# Altium PCB final-project.PcbDoc
Units mil, origin at the board's own origin, x right, y up, seen from the top; angles counter-clockwise.
Board outline 8070 x 7040 mil, 2 copper layers (Top Layer, Bottom Layer); 74 components, 70 nets, 225 pads, 13 vias.
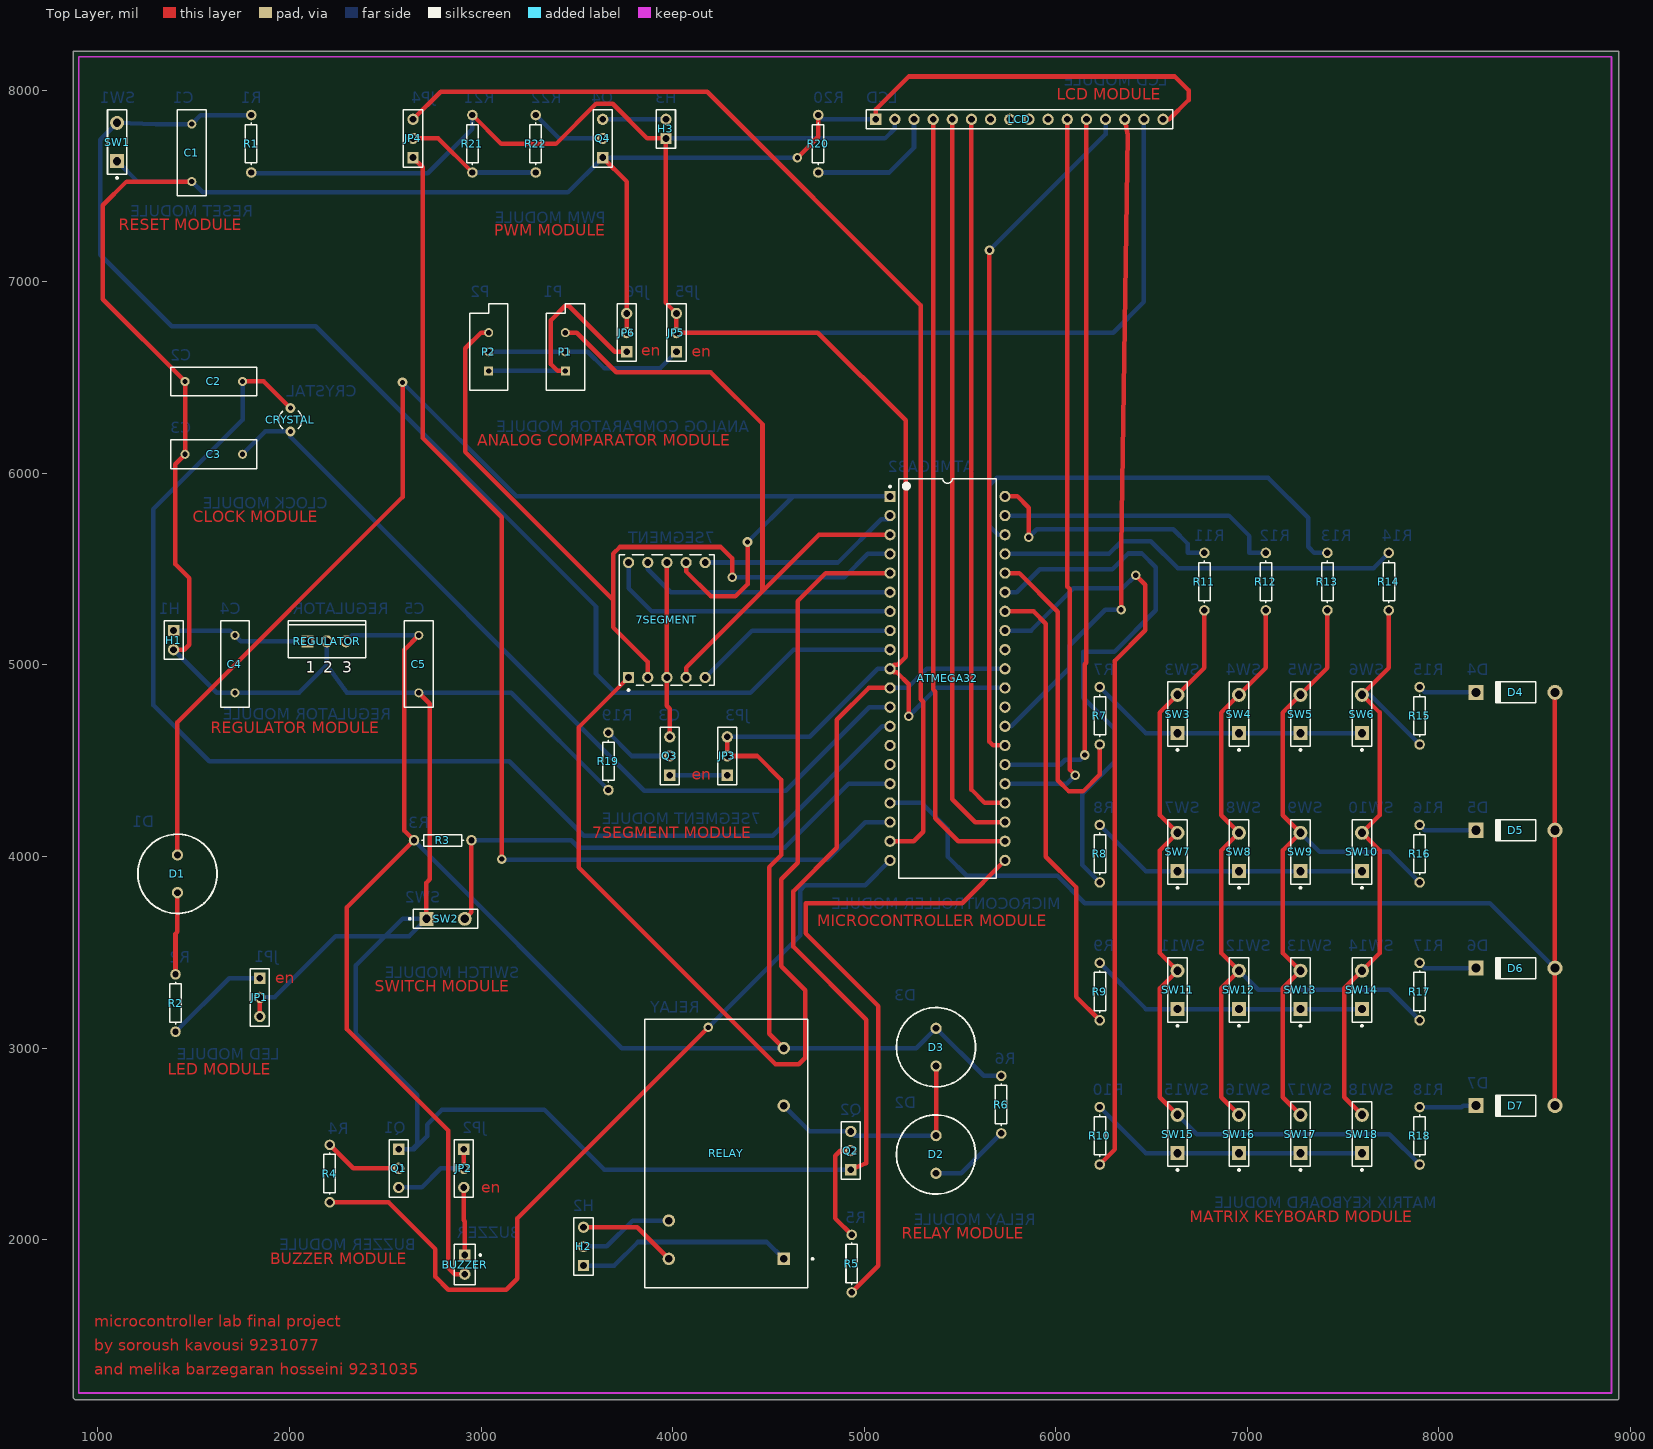
[diagram p0: Top Layer view]
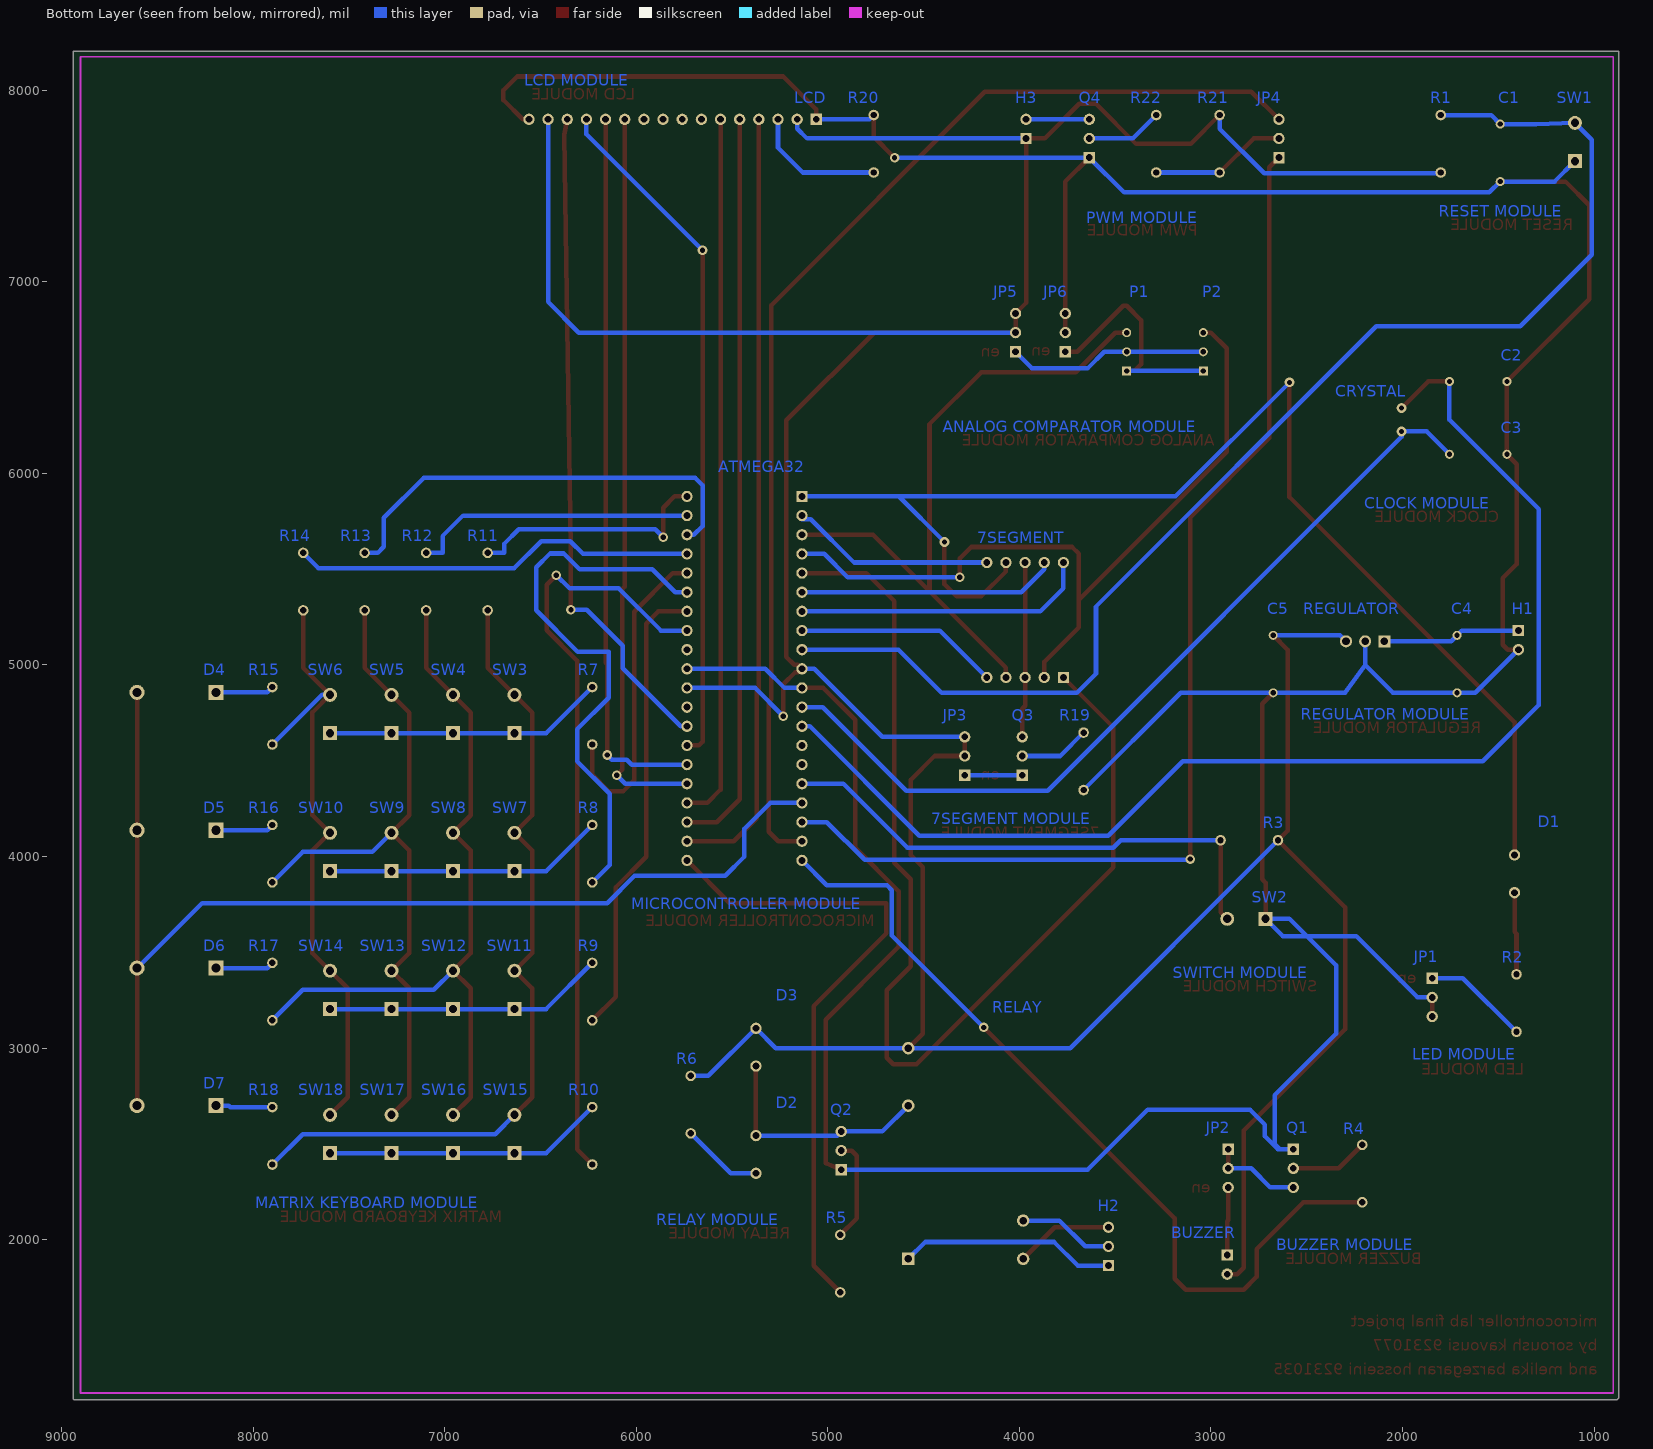
[diagram p1: Bottom Layer view, seen from below]

## Layer stack, top to bottom
Top Layer: signal copper 1.4
Dielectric: dielectric 12.6, FR-4, Dk 4.8
Bottom Layer: signal copper 1.4

## Board outline
870,8205 8940,8205 8940,1170 8935,1165 4515,1165 880,1165 870,1175 870,8205

## Design rules (kind name [scope] priority, off if disabled: settings)
Clearance [All] p1: gap=39.37
PolygonConnect [All] p1: connectstyle=Relief reliefconductorwidth=10 reliefentries=4 polygonreliefangle="90 Angle"
RoutingVias [All] p1: holewidth=28 width=50 viastyle="Through Hole" minholewidth=28 minwidth=50 maxholewidth=28 maxwidth=50
SilkscreenOverComponentPads [All] p1: minsilkscreentomaskgap=10
SolderMaskExpansion [All] p1: expansion=4
Width [All] p1: maxlimit=23.62 minlimit=23.62 preferedwidth=23.62 minimp=50.000000 maximp=50.000000 favimp=50.000000
27 further rules are at their usual default settings.

## Components (designator, comment, footprint, x,y, rotation, side; value= is the part's Value field where it differs from the comment)
7SEGMENT "HDSP-511A" HDSP-51 3970,5235 r0 top
ATMEGA32 "ATmega32A-PU" 40P6 5435,4930 r0 top
BUZZER "Bell" PIN2 2915,1920 r270 top
C1 "Cap" RAD-0.3 1490,7673.5 r90 top
C2 "Cap" RAD-0.3 1605,6480 r0 top
C3 "Cap" RAD-0.3 1605,6100 r0 top
C4 "Cap" RAD-0.3 1715,5005 r90 top
C5 "Cap" RAD-0.3 2675,5005 r90 top
CRYSTAL "XTAL" BCY-W2/D3.1 2005,6280 r0 top
D1 "LED0" RB5-10.5 1415,3910 r270 top
D2 "LED0" RB5-10.5 5375,2445 r90 top
D3 "LED0" RB5-10.5 5375,3005 r90 top
D4 "Diode 1N4001" DIO10.46-5.3x2.8 8400,4857.5 r180 top
D5 "Diode 1N4001" DIO10.46-5.3x2.8 8400,4137.5 r180 top
D6 "Diode 1N4001" DIO10.46-5.3x2.8 8400,3417.5 r180 top
D7 "Diode 1N4001" DIO10.46-5.3x2.8 8400,2700 r180 top
H1 "Header 2" HDR1X2 1395,5180 r270 top
H2 "Header 3" HDR1X3 3535,1865 r90 top
H3 "Header 2" HDR1X2 3965,7748.5 r90 top
JP1 "Header 3" HDR1X3 1845,3365 r270 top
JP2 "Header 3" HDR1X3 2910,2472.62 r270 top
JP3 "Header 3" HDR1X3 4285,4425 r90 top
JP4 "Header 3" HDR1X3 2645,7648.5 r90 top
JP5 "Header 3" HDR1X3 4020,6635 r90 top
JP6 "Header 3" HDR1X3 3760,6635 r90 top
LCD "Header 16" HDR1X16 5060,7848.5 r0 top
P1 "RPot" VR5 3440,6635 r90 top
P2 "RPot" VR5 3040,6635 r90 top
Q1 "2N3904" HDR1X3 2570,2472.62 r270 top
Q2 "2N3904" HDR1X3 4930,2365 r90 top
Q3 "2N3906" HDR1X3 3985,4425 r90 top
Q4 "2N3904" HDR1X3 3635,7648.5 r90 top
R1 "Res1" AXIAL-0.3 1800,7720.88 r270 top
R2 "Res1" AXIAL-0.3 1405,3235 r90 top
R3 "Res1" AXIAL-0.3 2800,4085 r180 top
R4 "Res1" AXIAL-0.3 2210,2345 r90 top
R5 "Res1" AXIAL-0.3 4935,1875 r90 top
R6 "Res1" AXIAL-0.3 5715,2705 r270 top
R7 "Res1" AXIAL-0.3 6230,4735 r90 top
R8 "Res1" AXIAL-0.3 6230,4015 r90 top
R9 "Res1" AXIAL-0.3 6230,3295 r90 top
R10 "Res1" AXIAL-0.3 6230,2542.5 r90 top
R11 "Res1" AXIAL-0.3 6775.93,5435 r90 top
R12 "Res1" AXIAL-0.3 7096.86,5435 r90 top
R13 "Res1" AXIAL-0.3 7417.8,5435 r90 top
R14 "Res1" AXIAL-0.3 7738.73,5435 r90 top
R15 "Res1" AXIAL-0.3 7899.19,4735 r90 top
R16 "Res1" AXIAL-0.3 7899.19,4015 r90 top
R17 "Res1" AXIAL-0.3 7899.19,3295 r90 top
R18 "Res1" AXIAL-0.3 7899.19,2542.5 r90 top
R19 "Res1" AXIAL-0.3 3665,4497.38 r90 top
R20 "Res1" AXIAL-0.3 4760,7720.88 r270 top
R21 "Res1" AXIAL-0.3 2955,7720.88 r90 top
R22 "Res1" AXIAL-0.3 3285,7720.88 r90 top
REGULATOR "MC7805ACT" 221A-04 2195,5123.7 r0 top
RELAY "Relay-SPDT" DIP-P5/X1.65 4280,2450 r90 top
SW1 "SW-PB" SPST-2 1100,7730 r90 top
SW2 "SW-PB" SPST-2 2815,3675 r0 top
SW3 "SW-PB" SPST-2 6635.47,4744.12 r90 top
SW4 "SW-PB" SPST-2 6956.4,4744.12 r90 top
SW5 "SW-PB" SPST-2 7277.33,4744.12 r90 top
SW6 "SW-PB" SPST-2 7598.26,4744.12 r90 top
SW7 "SW-PB" SPST-2 6635.47,4024.12 r90 top
SW8 "SW-PB" SPST-2 6956.4,4024.12 r90 top
SW9 "SW-PB" SPST-2 7277.33,4024.12 r90 top
SW10 "SW-PB" SPST-2 7598.26,4024.12 r90 top
SW11 "SW-PB" SPST-2 6635.47,3304.12 r90 top
SW12 "SW-PB" SPST-2 6956.4,3304.12 r90 top
SW13 "SW-PB" SPST-2 7277.33,3304.12 r90 top
SW14 "SW-PB" SPST-2 7598.26,3304.12 r90 top
SW15 "SW-PB" SPST-2 6635.47,2551.61 r90 top
SW16 "SW-PB" SPST-2 6956.4,2551.61 r90 top
SW17 "SW-PB" SPST-2 7277.33,2551.61 r90 top
SW18 "SW-PB" SPST-2 7598.26,2551.61 r90 top

## Footprints (in the part's own frame and the unit in brackets; to place one, negate y for a bottom-side part, rotate by r counter-clockwise, add the part's x,y. Pads: shape width x height; smd on the part's side, far side on the other; paste and mask are expansions set on the pad)
40P6 [mm] "DIP, 40-Leads, Row Spacing 15.24mm, Pitch 2.54mm, Body 52.2x13.95mm"
  rect 1.5x1.5 hole 0.9: 1(-7.62,24.13)
  round 1.5 hole 0.9: 2(-7.62,21.59) 3(-7.62,19.05) 4(-7.62,16.51) 5(-7.62,13.97) 6(-7.62,11.43) 7(-7.62,8.89) 8(-7.62,6.35) 9(-7.62,3.81) 10(-7.62,1.27) 11(-7.62,-1.27) 12(-7.62,-3.81) 13(-7.62,-6.35) 14(-7.62,-8.89) 15(-7.62,-11.43) 16(-7.62,-13.97) 17(-7.62,-16.51) 18(-7.62,-19.05) 19(-7.62,-21.59) 20(-7.62,-24.13) 21(7.62,-24.13) 22(7.62,-21.59) 23(7.62,-19.05) 24(7.62,-16.51) 25(7.62,-13.97) 26(7.62,-11.43) 27(7.62,-8.89) 28(7.62,-6.35) 29(7.62,-3.81) 30(7.62,-1.27) 31(7.62,1.27) 32(7.62,3.81) 33(7.62,6.35) 34(7.62,8.89) 35(7.62,11.43) 36(7.62,13.97) 37(7.62,16.51) 38(7.62,19.05) 39(7.62,21.59) 40(7.62,24.13)
  silkscreen extent -7.74,-26.5 6.45,26.5, body extent -7.05,-26.47 7.05,26.47, height 4.83
221A-04 [mm] "TO, Thru-Hole, Vertical, Heatsink Mounted; 3 In-Line Leads; Pitch 2.54 mm"
  rect 1.6x1.6 hole 1: 1(-2.54,0)
  round 1.6 hole 1: 2(0,0) 3(2.54,0)
  silkscreen extent -5.15,-2.2 5.15,2.7
AXIAL-0.3 [mm] "Axial Device, Thru-Hole; 2 Leads; 0.3 in Pin Spacing"
  round 1.4 hole 0.85: 1(-3.81,0) 2(3.81,0)
  silkscreen extent -2.77,-0.76 2.77,0.76
BCY-W2/D3.1 [mm] "Crystal, Thru-Hole; 2 Leads; Body 3.1 x 8.2 mm (Dia.xH)"
  round 1.3 hole 0.7: 1(0,1.55) 2(0,-1.55)
  silkscreen extent -1.55,-1.19 1.55,1.17
DIO10.46-5.3x2.8 [mm] "Diode, Axial; Body 5.2 x 2.7 mm (LxDia. max), Lead Dia. 0.86 mm (max)"
  round 2 hole 1.2: 1(-5.23,0)
  rect 2x2 hole 1.2: 2(5.23,0)
  silkscreen extent -2.65,-1.4 2.75,1.4
DIP-P5/X1.65 [mm] "DIP; 5 Round Pins; Row Space 15.24 mm; Pitch 2.54 mm"
  rect 1.65x1.65 hole 1: 1(-13.97,-7.62)
  round 1.65 hole 1: 2(-13.97,7.62) 3(-8.89,7.62) 4(13.97,-7.62) 5(6.35,-7.62)
  silkscreen extent -17.8,-11.58 17.8,10.8, body extent -17.8,-10.8 17.8,10.8, height 14
HDR1X2 [mm] "Connector; Header; 2 Position"
  rect 1.5x1.5 hole 0.9: 1(0,0)
  round 1.5 hole 0.9: 2(2.54,0)
  silkscreen extent -1.27,-1.27 3.81,1.27
HDR1X3 [mm] "Connector; Header; 3 Position"
  rect 1.5x1.5 hole 0.9: 1(0,0)
  round 1.5 hole 0.9: 2(2.54,0) 3(5.08,0)
  silkscreen extent -1.27,-1.27 6.35,1.27
HDR1X16 [mm] "Connector; Header; 16 Position"
  rect 1.5x1.5 hole 0.9: 1(0,0)
  round 1.5 hole 0.9: 2(2.54,0) 3(5.08,0) 4(7.62,0) 5(10.16,0) 6(12.7,0) 7(15.24,0) 8(17.78,0) 9(20.32,0) 10(22.86,0) 11(25.4,0) 12(27.94,0) 13(30.48,0) 14(33.02,0) 15(35.56,0) 16(38.1,0)
  silkscreen extent -1.27,-1.27 39.37,1.27
HDSP-51 [mm] "LED, 7-Segment Display, 14.27 mm, RHD; 10 Leads; Row Space 15.24 mm; Pitch 2.54 mm"
  rect 1.5x1.5 hole 0.9: 1(-5.08,-7.62)
  round 1.5 hole 0.9: 2(-2.54,-7.62) 3(0,-7.62) 4(2.54,-7.62) 5(5.08,-7.62) 6(5.08,7.62) 7(2.54,7.62) 8(0,7.62) 9(-2.54,7.62) 10(-5.08,7.62)
  silkscreen extent -6.3,-9.42 6.3,8.65
PIN2 [mm] "Photosensitive Diode; 2 Leads"
  rect 1.5x1.5 hole 0.9: 1(0,0)
  round 1.5 hole 0.9: 2(2.54,0)
  silkscreen extent -1.4,-1.4 3.94,2.18
RAD-0.3 [mm] "Radial Cap, Thru-Hole; 2 Leads; 0.3 in Pin Spacing"
  round 1.2 hole 0.7: 1(-3.81,0) 2(3.81,0)
  silkscreen extent -5.71,-1.91 5.72,1.91
RB5-10.5 [mm] "Motor, General Kind; 2 Leads"
  round 1.5 hole 0.9: 1(-2.5,0) 2(2.5,0)
  silkscreen extent -5.25,-5.25 5.25,5.25
SPST-2 [mm] "Circuit Breaker; 2 Leads"
  rect 1.85x1.85 hole 1.1: 1(-2.54,0)
  round 1.85 hole 1.1: 2(2.54,0)
  silkscreen extent -4.89,-1.27 4.28,1.27
VR5 [mm] "Variable Resistor, Thru-Hole; 3 Leads"
  rect 1.2x1.2 hole 0.7: 1(-2.54,0)
  round 1.2 hole 0.7: 2(0,0) 3(2.54,0)
  silkscreen extent -5.08,-2.54 6.35,2.54

## Part data
7SEGMENT: "14.22 mm General Purpose AlGaAs Red 7-Segment Display: CA, RH DP"
ATMEGA32: "8-bit AVR Microcontroller, 32KB Flash, 1KB EEPROM, 2KB SRAM, 40-pin PDIP, Industrial Grade (-40°C to 85°C)"
BUZZER: "Electrical Bell"
C1 C2 C3 C4 C5: "Capacitor"
CRYSTAL: "Crystal Oscillator"
D1 D2 D3: "Typical INFRARED GaAs LED"
D4 D5 D6 D7: "1 Amp General Purpose Rectifier"
H1 H3: "Header, 2-Pin"
H2 JP1 JP2 JP3 JP4 JP5 JP6: "Header, 3-Pin"
LCD: "Header, 16-Pin"
P1 P2: "Potentiometer"
Q1 Q2 Q4: "NPN General Purpose Amplifier"
Q3: "PNP General Purpose Amplifier"
R1 R2 R3 R4 R5 R6 R7 R8 R9 R10 R11 R12 R13 R14 R15 R16 R17 R18 R19 R20 R21 R22: "Resistor"
REGULATOR: "3-Terminal Positive Fixed Voltage Regulator"
RELAY: "Single-Pole Dual-Throw Relay"
SW1 SW2 SW3 SW4 SW5 SW6 SW7 SW8 SW9 SW10 SW11 SW12 SW13 SW14 SW15 SW16 SW17 SW18: "Switch"

## Via types
v1: diameter 50, hole 28, Top Layer to Bottom Layer, 13 vias

## Nets (pads, with @x,y where several pads share a name; then routed paths per layer and width w, separated by ;. In a path a pad name is that pad's centre, name@x,y a point inside that pad or via, vN(x,y) a via of type N, cw(c..) or ccw(c..) an arc to the next point about the centre after c; other vN are vias at no path point)
GND: ATMEGA32.11 ATMEGA32.31 C1.1 C2.1 C3.1 C4.1 C5.1 H1.2 JP1.2 JP1.3 JP6.2 JP6.3 LCD.1 LCD.16 Q1.1 Q2.1 Q4.1 R19.1 R20.1 REGULATOR.2 SW1.1 SW2.1 | length 23454.3
  Top Layer w23.62: H1.2 1450,5080 1476,5106 1476,5454 1403,5527 1403,6048 C3.1 C2.1 1026,6909 1026,7400 1149.5,7523.5 C1.1 ; JP1.3 JP1.2 ; C5.1 2733,4797 2733,3882 2715,3864 SW2.1 ; Q4.1 3760,7523.5 JP6.3 JP6.2 ; v1(4651.5,7648.5) 4760,7757 R20.1 ; Q2.1 5011,2400 5011,3148.7 4630.82,3528.88 4630.82,3819.16 4857,4045.33 4857,4714 5023,4880 ATMEGA32.11 ; LCD.1 5060,7900 5232,8072 6621,8072 6693,8000 6693,7949 6592.5,7848.5 LCD.16
  Bottom Layer w23.62: SW1.1 1206.5,7523.5 C1.1 1546.5,7467 3453.5,7467 Q4.1 v1(4651.5,7648.5) ; H1.2 1620,4855 C4.1 2050,4855 2195,5000 ; JP1.2 1922,3265 2242,3585 2500,3585 ; REGULATOR.2 2195,5000 ; R19.1 3157.38,4855 C5.1 2300,4855 2195,5000 ; R20.1 4782.38,7848.5 LCD.1 ; Q2.1 3644,2365 3331,2678 2796,2678 2718,2600 2718,2540.62 2650,2472.62 2640.62,2472.62 ; ATMEGA32.11 5226,4880 5326,4980 ATMEGA32.31 ; 2500,3585 2625,3585 SW2.1 2590,3675 2500,3585 ; 2500,3585 2347,3432 2347,3075 2668,2754 2668,2500 2640.62,2472.62 ; 2640.62,2472.62 Q1.1 2640.62,2472.62
Net7SEGMENT_3: 7SEGMENT.3 7SEGMENT.8 Q3.3 | length 916.2
  Top Layer w23.62: 7SEGMENT.8 7SEGMENT.3 3970,4787 3985,4772 Q3.3
NetBUZZER_1: BUZZER.1 JP2.3 | length 354.7
  Top Layer w23.62: JP2.3 2910,2101 2915,2096 BUZZER.1
NetC4_2: C4.2 H1.1 REGULATOR.1 | length 723.3
  Bottom Layer w23.62: H1.1 1690,5180 C4.2 1746.3,5123.7 REGULATOR.1
NetD1_2: D1.2 R2.2 | length 430.7
  Top Layer w23.62: R2.2 1405,3598 1415,3608 D1.2
NetD2_1: D2.1 R6.2 | length 426.3
  Bottom Layer w23.62: D2.1 5506.58,2346.58 R6.2
NetD2_2: D2.2 D3.1 Q2.3 RELAY.5 | length 1223
  Top Layer w23.62: D2.2 D3.1
  Bottom Layer w23.62: RELAY.5 4715,2565 Q2.3 4951.57,2543.43 D2.2
NetD4_2: D4.2 R15.2 | length 306.3
  Bottom Layer w23.62: R15.2 7926.69,4857.5 D4.2
NetD5_2: D5.2 R16.2 | length 306.3
  Bottom Layer w23.62: R16.2 7926.69,4137.5 D5.2
NetD6_2: D6.2 R17.2 | length 306.3
  Bottom Layer w23.62: R17.2 7926.69,3417.5 D6.2
NetD7_2: D7.2 R18.2 | length 298
  Bottom Layer w23.62: R18.2 8119,2692.5 8126.5,2700 D7.2
NetH2_1: H2.1 RELAY.1 | length 1132.4
  Bottom Layer w23.62: H2.1 3696,1865 3819,1988 4492,1988 RELAY.1
NetH2_2: H2.2 RELAY.3 | length 500.9
  Bottom Layer w23.62: H2.2 3657,1965 3792,2100 RELAY.3
NetH2_3: H2.3 RELAY.2 | length 513.3
  Top Layer w23.62: H2.3 3815,2065 RELAY.2
NetH3_2: H3.2 Q4.3 | length 330
  Bottom Layer w23.62: Q4.3 H3.2
NetJP1_1: JP1.1 R2.1 | length 556
  Bottom Layer w23.62: R2.1 1685,3365 JP1.1
NetJP2_1: JP2.1 JP2.2 Q1.3 | length 481.4
  Top Layer w23.62: JP2.2 JP2.1
  Bottom Layer w23.62: Q1.3 2690,2272.62 2790,2372.62 JP2.2
NetJP3_1: JP3.1 Q3.1 | length 300
  Bottom Layer w23.62: Q3.1 JP3.1
NetJP4_2: JP4.2 R21.1 R22.1 | length 713.6
  Top Layer w23.62: JP4.2 2777.38,7748.5 R21.1
  Bottom Layer w23.62: R21.1 R22.1
NetJP5_1: JP5.1 P1.2 P2.2 | length 1050.4
  Bottom Layer w23.62: P2.2 P1.2 3557,6635 3642,6550 3935,6550 JP5.1
NetJP6_1: JP6.1 P1.1 P2.1 | length 1245
  Top Layer w23.62: P1.1 3400,6535 3365,6570 3365,6800 3440,6875 3458,6875 3698,6635 JP6.1
  Bottom Layer w23.62: P2.1 P1.1
NetLCD_3: LCD.3 R20.2 | length 702
  Bottom Layer w23.62: R20.2 5130.88,7570.88 5260,7700 LCD.3
NetQ1_2: Q1.2 R4.2 | length 410.7
  Top Layer w23.62: R4.2 2332.38,2372.62 Q1.2
NetQ2_2: Q2.2 R5.2 | length 541.4
  Top Layer w23.62: Q2.2 4875,2465 4849,2439 4849,2111 R5.2
NetQ3_2: Q3.2 R19.2 | length 370.7
  Bottom Layer w23.62: R19.2 3787.38,4525 Q3.2
NetQ4_2: Q4.2 R22.2 | length 400.7
  Bottom Layer w23.62: R22.2 3407.38,7748.5 Q4.2
NetR7_2: R7.2 SW3.1 SW4.1 SW5.1 SW6.1 | length 1468
  Bottom Layer w23.62: R7.2 6470.88,4644.12 SW3.1 SW4.1 SW5.1 SW6.1
NetR8_2: R8.2 SW7.1 SW8.1 SW9.1 SW10.1 | length 1468
  Bottom Layer w23.62: R8.2 6470.88,3924.12 SW7.1 SW8.1 SW9.1 SW10.1
NetR9_2: R9.2 SW11.1 SW12.1 SW13.1 SW14.1 | length 1468
  Bottom Layer w23.62: R9.2 6470.88,3204.12 SW11.1 SW12.1 SW13.1 SW14.1
NetR10_2: R10.2 SW15.1 SW16.1 SW17.1 SW18.1 | length 1468
  Bottom Layer w23.62: R10.2 6470.88,2451.61 SW15.1 SW16.1 SW17.1 SW18.1
NetR11_1: R11.1 R18.1 SW3.2 SW7.2 SW11.2 SW15.2 | length 4292.4
  Top Layer w23.62: SW15.2 6543,2744.08 6543,3311.65 SW11.2 6543,3496.58 6543,4031.65 SW7.2 6543,4216.58 6543,4751.65 SW3.2 6775.93,4984.58 R11.1
  Bottom Layer w23.62: SW15.2 6736.08,2551 7740.69,2551 R18.1
NetR12_1: R12.1 R17.1 SW4.2 SW8.2 SW12.2 SW16.2 | length 3971.3
  Top Layer w23.62: SW16.2 6864,2744.01 6864,3311.72 SW12.2 6864,3496.52 6864,4031.72 SW8.2 6864,4216.52 6864,4751.72 SW4.2 7096.86,4984.58 R12.1
  Bottom Layer w23.62: SW12.2 7056.52,3304 7740.19,3304 R17.1
NetR13_1: R13.1 R16.1 SW5.2 SW9.2 SW13.2 SW17.2 | length 3650.2
  Top Layer w23.62: SW17.2 7185,2743.94 7185,3311.79 SW13.2 7185,3496.45 7185,4031.79 SW9.2 7185,4216.45 7185,4751.79 SW5.2 7417.8,4984.58 R13.1
  Bottom Layer w23.62: SW9.2 7377.45,4024 7740.19,4024 R16.1
NetR14_1: R14.1 R15.1 SW6.2 SW10.2 SW14.2 SW18.2 | length 3328.3
  Top Layer w23.62: SW18.2 7506,2743.88 7506,3311.86 SW14.2 7690,3495.86 7690,4032.38 SW10.2 7690,4215.86 7690,4752.38 SW6.2 7738.73,4984.58 R14.1
  Bottom Layer w23.62: SW6.2 7640.08,4844.12 R15.1
PA0: ATMEGA32.40 R11.2 | length 1315.7
  Top Layer w23.62: ATMEGA32.40 5800,5880 5859,5821 v1(5859,5667)
  Bottom Layer w23.62: v1(5859,5667) 5901,5709 6613,5709 6690,5632 6690,5585 R11.2
PA1: ATMEGA32.39 R12.2 | length 1494.2
  Bottom Layer w23.62: ATMEGA32.39 6904,5780 7011,5673 7011,5585 R12.2
PA2: ATMEGA32.38 R13.2 | length 2344.8
  Bottom Layer w23.62: ATMEGA32.38 5699,5680 5654,5725 5654,5939 5693,5978 7108,5978 7318,5768 7318,5617 7350,5585 R13.2
PA3: ATMEGA32.37 R14.2 | length 2121.7
  Bottom Layer w23.62: ATMEGA32.37 6277.83,5580 6343.79,5645.96 6496.49,5645.96 6636.45,5506 7659.73,5506 R14.2
PA4: ATMEGA32.36 R7.1 | length 1676.1
  Top Layer w23.62: ATMEGA32.36 5809,5480 6010.91,5278.09 6010.91,4398.09 6069,4340 6142,4340 6230,4428 R7.1
PA5: ATMEGA32.35 R8.1 | length 2972.9
  Bottom Layer w23.62: ATMEGA32.35 5797,5380 5917,5500 6296,5500 6378,5582 6450,5582 6522.01,5509.99 6522.01,5285 6305.18,5068.16 6144,5068.16 6144,4829 6309,4664 6309,4497.82 6139,4327.82 6139,3956 R8.1
PA6: ATMEGA32.34 R9.1 | length 2427.3
  Top Layer w23.62: ATMEGA32.34 5884,5280 5947.92,5216.08 5947.92,3999.08 6106,3841 6106,3269 R9.1
PA7: ATMEGA32.33 R10.1 | length 3997.1
  Top Layer w23.62: R10.1 6309,2471.5 6309,5023 6467,5181 6467,5419 v1(6417,5469)
  Bottom Layer w23.62: ATMEGA32.33 5871,5180 6090.51,5399.51 6347.51,5399.51 v1(6417,5469)
PB0: 7SEGMENT.7 ATMEGA32.1 D1.1 | length 7256.3
  Top Layer w23.62: D1.1 1415,4702 2590,5877 v1(2590,6475) ; 7SEGMENT.7 4070,5488 4200,5358 4328,5358 4391,5421 v1(4391,5642)
  Bottom Layer w23.62: v1(2590,6475) 3185,5880 4629,5880 ; v1(4391,5642) 4629,5880 ; 4629,5880 ATMEGA32.1 4629,5880
PB1: 7SEGMENT.6 ATMEGA32.2 | length 1077.6
  Bottom Layer w23.62: 7SEGMENT.6 4863,5535 5089,5761 5135,5761 ATMEGA32.2
PB2: 7SEGMENT.4 ATMEGA32.3 P1.3 | length 4067.5
  Top Layer w23.62: P1.3 3500,6735 3706,6529 4198,6529 4469.18,6257.82 4469.18,5385.18 ; 7SEGMENT.4 4070,4986 ; ATMEGA32.3 4764,5680 4469.18,5385.18 ; 4070,4986 4469.18,5385.18 ; 4070,4986 4469.18,5385.18
PB3: 7SEGMENT.2 ATMEGA32.4 P2.3 | length 4285.6
  Top Layer w23.62: P2.3 3000,6735 2918,6653 2918,6112 3689,5341 ; 7SEGMENT.2 3870,5016 3689,5197 ; v1(4311,5458) 4311,5556 4251,5616 3725,5616 3689,5580 3689,5341 ; 3689,5197 3689,5341 ; 3689,5197 3689,5341
  Bottom Layer w23.62: v1(4311,5458) 4897,5458 5019,5580 ATMEGA32.4
PB4: 7SEGMENT.1 ATMEGA32.5 | length 5736
  Top Layer w23.62: 7SEGMENT.1 3509,4674 3509,3944 4537,2916 4659,2916 4693,2950 4693,3301.65 4567.83,3426.82 4567.83,3882.15 4654,3968.32 4654,5334 4800,5480 ATMEGA32.5
PB5: 7SEGMENT.9 ATMEGA32.6 | length 1349.7
  Bottom Layer w23.62: 7SEGMENT.9 3870,5500 3990,5380 ATMEGA32.6
PB6: 7SEGMENT.10 ATMEGA32.7 | length 1549.7
  Bottom Layer w23.62: 7SEGMENT.10 3770,5400 3890,5280 ATMEGA32.7
PB7: 7SEGMENT.5 ATMEGA32.8 | length 1066.5
  Bottom Layer w23.62: 7SEGMENT.5 4415,5180 ATMEGA32.8
PC0: ATMEGA32.22 LCD.4 | length 4066.7
  Top Layer w23.62: LCD.4 5360,4872.36 5371.17,4861.18 5371.17,4200 5491.17,4080 ATMEGA32.22
PC1: ATMEGA32.23 LCD.5 | length 3873.2
  Top Layer w23.62: LCD.5 5460,4300 5580,4180 ATMEGA32.23
PC2: ATMEGA32.24 LCD.6 | length 3702.5
  Top Layer w23.62: LCD.6 5560,4350 5630,4280 ATMEGA32.24
PC3: ATMEGA32.25 LCD.11 | length 3826.5
  Top Layer w23.62: LCD.11 6060,5409.48 6073.9,5395.58 6073.9,4453.1 v1(6102,4425)
  Bottom Layer w23.62: ATMEGA32.25 6057,4380 v1(6102,4425)
PC4: ATMEGA32.26 LCD.12 | length 3758.9
  Top Layer w23.62: v1(6151,4530) 6151,5003.24 6160,5012.24 LCD.12
  Bottom Layer w23.62: ATMEGA32.26 6022.82,4480 6049,4506.18 6127.18,4506.18 v1(6151,4530)
PC5: ATMEGA32.27 LCD.13 | length 3589.4
  Top Layer w23.62: v1(5654,7165) 5654,4599 5673,4580 ATMEGA32.27
  Bottom Layer w23.62: v1(5654,7165) 6260,7771 LCD.13
PC6: ATMEGA32.28 LCD.14 | length 3488.7
  Top Layer w23.62: v1(6340.82,5289) 6340.82,5610 6376,7768 LCD.14
  Bottom Layer w23.62: ATMEGA32.28 5767,4680 6070.14,4983.14 6070.14,5101.3 6257.84,5289 v1(6340.82,5289)
PC7: ATMEGA32.29
PD0: ATMEGA32.14
PD1: ATMEGA32.15
PD2: ATMEGA32.16 R3.1 SW2.2 | length 2764.1
  Top Layer w23.62: SW2.2 2950,3710 R3.1
  Bottom Layer w23.62: R3.1 3470,4085 3509.18,4045.82 4584.18,4045.82 4918.35,4380 ATMEGA32.16
PD3: ATMEGA32.17 D4.1 D5.1 D6.1 D7.1 | length 6070.6
  Top Layer w23.62: D7.1 D6.1 D5.1 D4.1
  Bottom Layer w23.62: ATMEGA32.17 5300,4280 5435,4145 5435,4000 5536,3899 6009,3899 6151,3757 8266.41,3757 D6.1
PD4: ATMEGA32.18 JP4.1 | length 5963.7
  Top Layer w23.62: JP4.1 2695,7598.5 2695,6185 3108,5772 v1(3108,3987)
  Bottom Layer w23.62: v1(3108,3987) 3112.17,3982.83 4808,3982.83 5005.17,4180 ATMEGA32.18
PD5: ATMEGA32.19 JP4.3 | length 6118.3
  Top Layer w23.62: JP4.3 2788.7,7992.21 4180.79,7992.21 5296,6877 5296,4821.18 5308.18,4809 5308.18,4130.18 5258,4080 ATMEGA32.19
PD6: ATMEGA32.20 R4.1 | length 4449.8
  Top Layer w23.62: R4.1 2517,2195 2762,1950 2762,1806 2829,1739 3132,1739 3189,1796 3189,2111 v1(4186,3108)
  Bottom Layer w23.62: v1(4186,3108) 4666,3588 4666,3825 4691,3850 5005,3850 ATMEGA32.20
PD7: ATMEGA32.21 R5.1 | length 3380.1
  Top Layer w23.62: R5.1 5074,1864 5074,3219.82 4693.82,3600 4693.82,3756.16 5511.16,3756.16 ATMEGA32.21
RESET: ATMEGA32.9 C1.2 R1.1 SW1.2 | length 6814.7
  Bottom Layer w23.62: R1.1 1537.38,7870.88 C1.2 1301.5,7823.5 SW1.2 1012,7742 1012,7141 1385,6768 2137,6768 3600,5305 3600,4954 3700,4854 4405,4854 4631,5080 ATMEGA32.9
VCC: ATMEGA32.10 ATMEGA32.30 BUZZER.2 C5.2 D3.2 H3.1 JP3.2 JP3.3 JP5.2 JP5.3 LCD.2 LCD.15 R1.2 R3.2 R6.1 R21.2 REGULATOR.3 RELAY.4 | length 22668.6
  Top Layer w23.62: C5.2 2600,5080 2600,4135 R3.2 2300,3735 2300,3099 2829,2570 2829,1854 2863,1820 BUZZER.2 ; R21.2 3105.88,7720 3391,7720 3600.21,7929.21 3686.79,7929.21 3867.5,7748.5 H3.1 3965,6890 JP5.3 JP5.2 4758,6735 5216,6277 5216,5042 5175,5001 5156,5001 ATMEGA32.10 5154,4961 5171,4961 5232,4900 v1(5232,4733) ; JP3.3 JP3.2 4442.83,4525 4567.83,4400 4567.83,4008.13 4504.84,3945.14 4504.84,3075.16 RELAY.4
  Bottom Layer w23.62: R1.2 1800,7567 2722,7567 2955,7800 R21.2 ; REGULATOR.3 2326.3,5155 C5.2 ; R3.2 3735,3000 RELAY.4 5271.57,3000 D3.2 5623.43,2855 R6.1 ; H3.1 5108.5,7748.5 5160,7800 LCD.2 ; JP5.2 6300,6735 6460,6895 LCD.15 ; JP3.3 4715.18,4625 5070.18,4980 ATMEGA32.10 ; v1(5232,4733) 5379,4880 ATMEGA32.30
XTAL1: ATMEGA32.13 C2.2 CRYSTAL.1 | length 6554.8
  Top Layer w23.62: C2.2 1866.02,6480 CRYSTAL.1
  Bottom Layer w23.62: C2.2 1755,6280 1289,5814 1289,4791 1582,4498 3147,4498 3536.18,4108.82 4522,4108.82 5093.18,4680 ATMEGA32.13
XTAL2: ATMEGA32.12 C3.2 CRYSTAL.2 | length 4402.9
  Bottom Layer w23.62: C3.2 1873.98,6218.98 CRYSTAL.2 2005,6191 3852,4344 4591,4344 5027,4780 ATMEGA32.12
pads on no net: ATMEGA32.32 LCD.7 LCD.8 LCD.9 LCD.10

## Keep-outs
Keep-Out Layer:
  lines w10: 900,1200 900,8175 8900,8175 8900,1200 900,1200

## Other copper
Top Layer:
  text "LCD MODULE" at 6005,7950 h60
  text "RESET MODULE" at 1110,7270 h60
  text "PWM MODULE" at 3070,7240 h60
  text "en" at 3835,6615 h60
  text "en" at 4100,6610 h60
  text "ANALOG COMPARATOR MODULE" at 2980,6145 h60
  text "CLOCK MODULE" at 1495,5745 h60
  text "REGULATOR MODULE" at 1590,4645 h60
  text "en" at 4100,4400 h60
  text "7SEGMENT MODULE" at 3580,4095 h60
  text "MICROCONTROLLER MODULE" at 4755,3635 h60
  text "en" at 1925,3340 h60
  text "SWITCH MODULE" at 2445,3295 h60
  text "LED MODULE" at 1365,2860 h60
  text "en" at 3000,2245 h60
  text "MATRIX KEYBOARD MODULE" at 6700,2090 h60
  text "RELAY MODULE" at 5195,2005 h60
  text "BUZZER MODULE" at 1900,1872.38 h60
  text "microcontroller lab final project" at 980,1545 h60
  text "by soroush kavousi 9231077" at 980,1420 h60
  text "and melika barzegaran hosseini 9231035" at 980,1295 h60
Bottom Layer:
  text "LCD MODULE" at 6585,8025 h60
  text "RESET MODULE" at 1810,7340 h60
  text "PWM MODULE" at 3650,7305 h60
  text "ANALOG COMPARATOR MODULE" at 4400,6215 h60
  text "CLOCK MODULE" at 2200,5815 h60
  text "REGULATOR MODULE" at 2530,4715 h60
  text "7SEGMENT MODULE" at 4460,4170 h60
  text "MICROCONTROLLER MODULE" at 6025,3725 h60
  text "SWITCH MODULE" at 3200,3365 h60
  text "LED MODULE" at 1950,2940 h60
  text "R4" at 2310,2550 h60
  text "MATRIX KEYBOARD MODULE" at 7990,2165 h60
  text "RELAY MODULE" at 5895,2075 h60
  text "BUZZER MODULE" at 2660,1944.76 h60

## Text inside footprints (layer, text, board x,y; h text height)
REGULATOR: Top Overlay "3" at 2275.32,4959.33 h59.06; Top Overlay "2" at 2175.32,4959.33 h59.06; Top Overlay "1" at 2085.16,4959.33 h59.06